# Altium PCB СхемаПолумостовая.PcbDoc
Units mm, origin at the board's own origin, x right, y up, seen from the top; angles counter-clockwise.
Board outline 169.54 x 72 mm, 2 copper layers (Top Layer, Bottom Layer); 84 components, 44 nets, 197 pads, 35 vias.
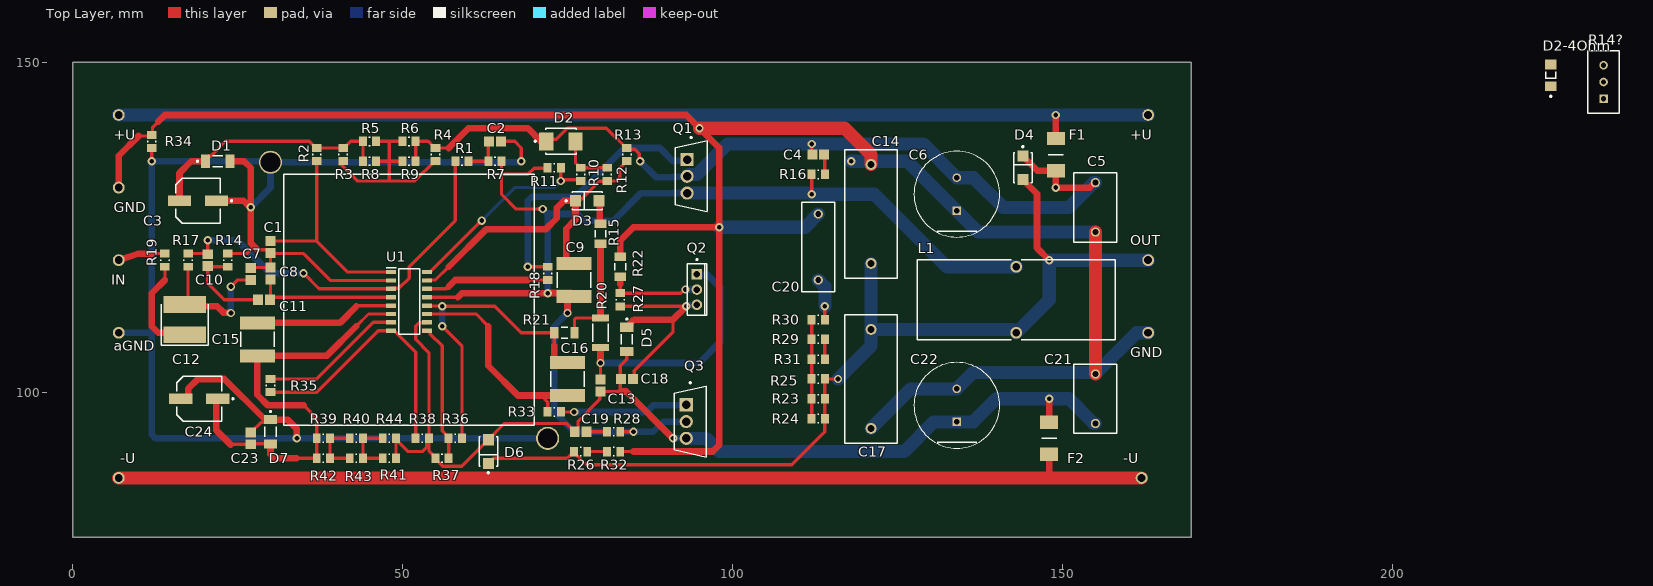
[diagram p0: Top Layer view]
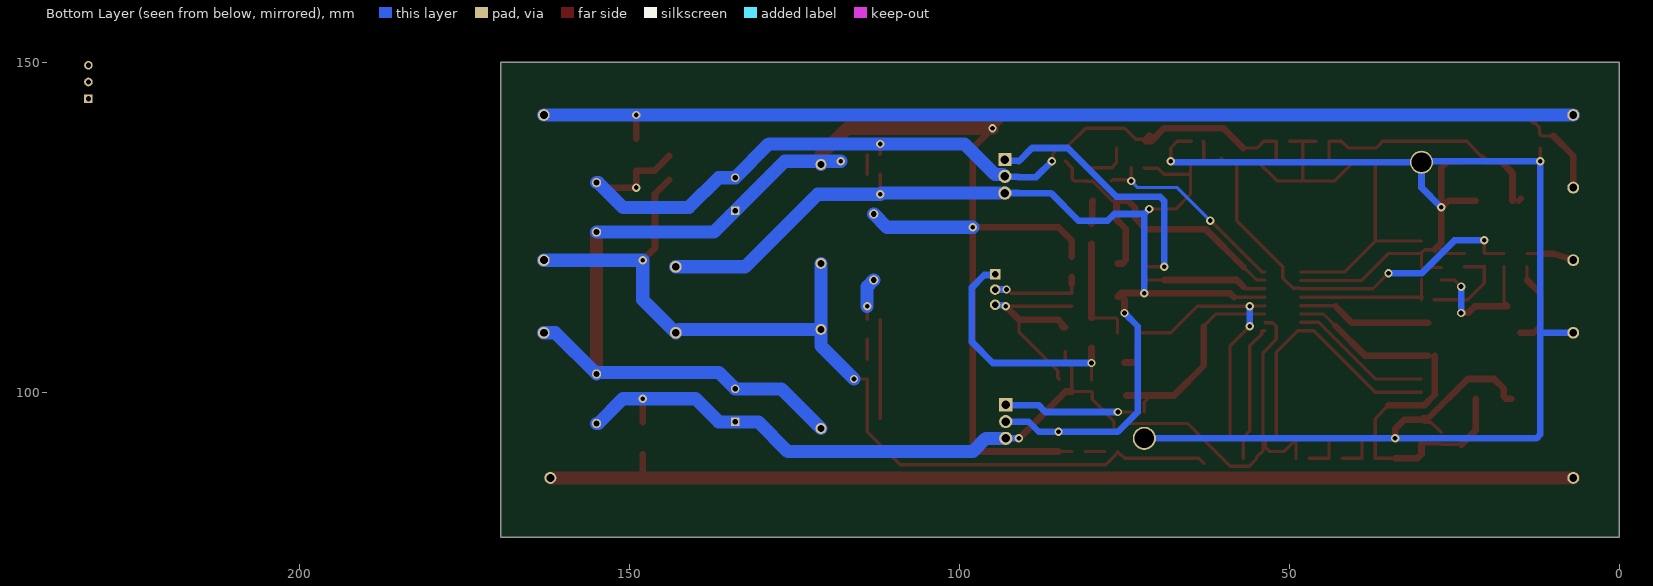
[diagram p1: Bottom Layer view, seen from below]
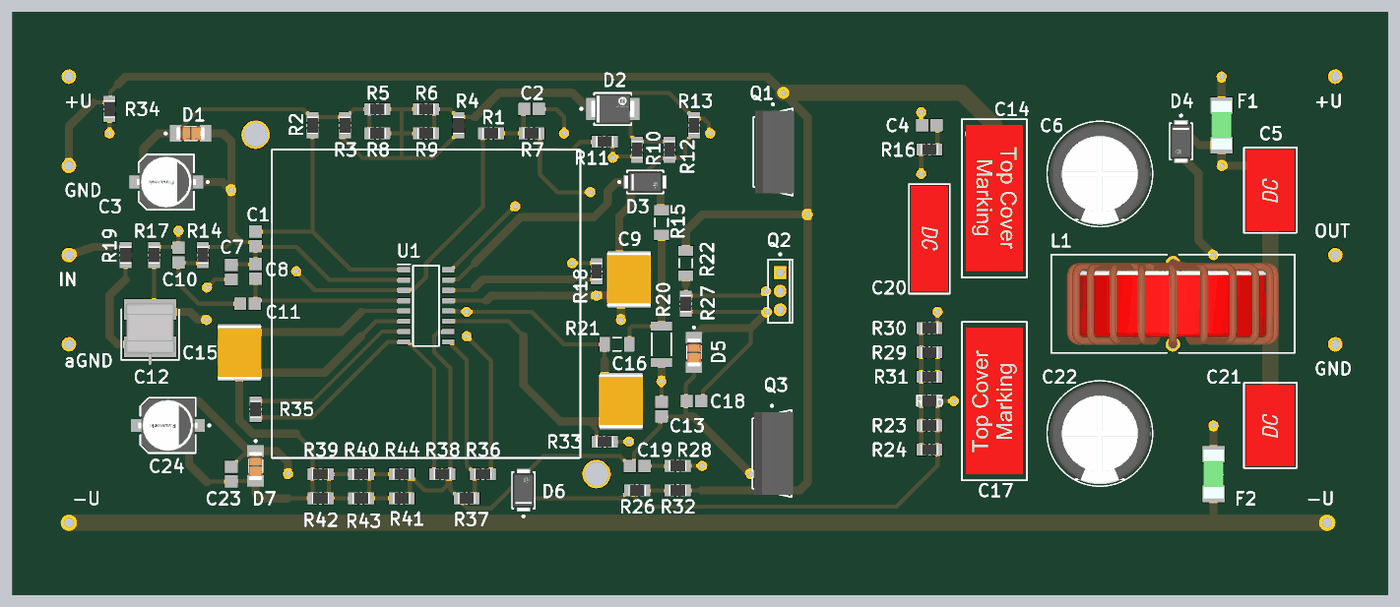
[diagram p2: 3D render of the assembled board from above, using the file's embedded part models]

## Layer stack, top to bottom
Top Solder: solder mask 0.0102, Solder Resist, Dk 3.5
Top Layer: signal copper 0.0356
Dielectric 1: dielectric 0.32, FR-4, Dk 4.8
Bottom Layer: signal copper 0.0356
Bottom Solder: solder mask 0.0102, Solder Resist, Dk 3.5

## Board outline
0,78 169.545,78 169.545,150 0,150

## Design rules (kind name [scope] priority, off if disabled: settings)
Clearance [All] p1: gap=0.254 ignorepadtopadclearanceinfootprint=FALSE
PolygonConnect [All] p1: connectstyle=Relief reliefconductorwidth=0.254 reliefentries=4 polygonreliefangle="90 Angle" airgapwidth=0.254
RoutingVias [All] p1: holewidth=0.711 width=1.27 viastyle="Through Hole" minholewidth=0.711 minwidth=1.27 maxholewidth=0.711 maxwidth=1.27
SolderMaskExpansion [All] p1: expansion=0.102 istentingtop=FALSE
SupplyNets "Schematic Supply Nets_1" [InNet('aGND')] p1: voltage=0.000
SupplyNets "Schematic Supply Nets" [InNet('GND')] p2: voltage=0.000
Width [All] p1: maxlimit=2 minlimit=0.5 preferedwidth=1 minimp=50.000000 maximp=50.000000 favimp=50.000000
30 further rules are at their usual default settings.

## Components (designator, comment, footprint, x,y, rotation, side; value= is the part's Value field where it differs from the comment)
C1 "2u2" CAPC2013X145X50ML20T25 30,122 r90 top
C2 "15p" CAPC2013X145X50ML20T25 64,138 r180 top
C3 "220u 16V" FP-OS-CON-SMT-C6-MFG 19,129 r180 top
C4 "220p" CAPC2013X145X50ML20T25 113,136 r180 top
C5 "0.068Uf" WCAP-FTX2_L10W6H12_CS 155,128 r90 top
C6 "470uF 63V" FP-RAD-TH-D_12_5_0_5-L_20-MFG 134,130 r90 top
C7 "2n2" CAPC2013X145X50ML20T25 27,117.9 r90 top
C8 "2n2" CAPC2013X145X50ML20T25 30,118 r90 top
C9 "22uF" CAPC5950X255X70LL75T35 76,117 r90 top
C10 "2n2" CAPC2013X145X50ML20T25 20.5,120 r90 top
C11 "2n2" CAPC2013X145X50ML20T25 29,114 r0 top
C12 "TAN 47u" CAPPC5760X640N 17,111 r90 top
C13 "2u2" CAPC2013X145X50ML20T25 80,101 r90 top
C14 "1uf 100V" WCAP-FTBP_L18W7H13 121,127 r270 top
C15 "22uF" CAPC5950X255X70LL75T35 28,108 r90 top
C16 "22uF" CAPC5950X255X70LL75T35 75,102 r90 top
C17 "1uf 100V" WCAP-FTBP_L18W7H13 121,102 r90 top
C18 "2u2" CAPC2013X145X50ML20T25 84,102 r0 top
C19 "220p" CAPC2013X145X50ML20T25 77,94 r0 top
C20 "0.022Uf" WCAP-FTX2_L13W4.5H9.5 113,122 r270 top
C21 "680nF" WCAP-FTX2_L10W6H12_CS 155,99 r90 top
C22 "470uF 63V" FP-RAD-TH-D_12_5_0_5-L_20-MFG 134,98 r90 top
C23 "2u2" CAPC2013X145X50ML20T25 27,93 r270 top
C24 "220u 16V" FP-OS-CON-SMT-C6-MFG 19.2,99 r180 top
D1 "BZV55C5V6" FP-DO-213AA-MFG 22,135 r0 top
D2 "MURS120T3G" FP-403A-03-MFG 74,138 r0 top
D2-4Ohm "BAV102" FP-100AD-IPC_A 224,148 r90 top
D3 "ES1D-E3/61T" FP-95400-MFG 78,129 r0 top value="10 pF"
D4 "ES1D-E3/61T" FP-95400-MFG 144,134 r270 top value="10 pF"
D5 "BZV55C12" FP-DO-213AA-MFG 84,108 r270 top
D6 "ES1D-E3/61T" FP-95400-MFG 63,91 r90 top value="10 pF"
D7 "BZV55C5V6" FP-DO-213AA-MFG 30,94 r270 top
F1 "10A" FUSC6025X270N 149,136 r90 top
F2 "10A" FUSC6025X270N 148,93 r270 top
L1 "10mH 30A" 744151 143,114 r0 top
Q1 "IRFB5615PBF" FP-PG-TO220-3-MFG 93.738,132.702 r0 top
Q2 "BD139" ONSC-TO-225-3-77-09 94.615,115.548 r0 top
Q3 "IRFB5615PBF" FP-PG-TO220-3-MFG 93.61,95.54 r0 top
R1 "68K" RESC2013X60X35ML10T20 59,135 r0 top
R2 "0R" RESC2013X60X35ML10T20 37,136 r90 top
R3 "2K2" RESC2013X60X35ML10T20 41,136 r270 top
R4 "2K2" RESC2013X60X35ML10T20 55,136 r90 top
R5 "2K2" RESC2013X60X35ML10T20 45,138 r0 top
R6 "2K2" RESC2013X60X35ML10T20 51,138 r0 top
R7 "0K5" RESC2013X60X35ML10T20 64,135 r180 top
R8 "2K2" RESC2013X60X35ML10T20 45,135 r0 top
R9 "2K2" RESC2013X60X35ML10T20 51,135 r0 top
R10 "1K8" RESC2013X60X35ML10T20 77,133 r90 top
R11 "8K2" RESC2013X60X35ML10T20 73,134 r0 top
R12 "8K2" RESC2013X60X35ML10T20 81,133 r90 top
R13 "18K" RESC2013X60X35ML10T20 84,136 r90 top
R14 "220R" RESC2013X60X35ML10T20 23.5,120 r90 top
R14? "3296W-220R" BOUR-3296W-1-3 232,147 r90 top
R15 "2R2" RESC3116X65X40ML10T20 80,124 r90 top
R16 "4R7" RESC2013X60X35ML10T20 113,133 r0 top
R17 "1K5" RESC2013X60X35ML10T20 17.5,120 r90 top
R18 "4R7" RESC2013X60X35ML10T20 72,118 r90 top
R19 "0K5" RESC2013X60X35ML10T20 14,120 r270 top
R20 "0R" RESC2010(5025)_L 80,109 r90 top value="1500.00 Ohm"
R21 "2R2" RESC3116X65X40ML10T20 74.525,109 r0 top
R22 "2R2" RESC3116X65X40ML10T20 83,119 r90 top
R23 "10R" RESC2013X60X35ML10T20 113,99 r0 top
R24 "10R" RESC2013X60X35ML10T20 113,96 r0 top
R25 "10R" RESC2013X60X35ML10T20 113,102 r0 top
R26 "0K5" RESC2013X60X35ML10T20 77,91 r180 top
R27 "8K2" RESC2013X60X35ML10T20 83,114 r90 top
R28 "4R7" RESC2013X60X35ML10T20 82,94 r0 top
R29 "10R" RESC2013X60X35ML10T20 113,108 r180 top
R30 "10R" RESC2013X60X35ML10T20 113,111 r180 top
R31 "10R" RESC2013X60X35ML10T20 113,105 r180 top
R32 "0K5" RESC2013X60X35ML10T20 82,91 r180 top
R33 "4R7" RESC2013X60X35ML10T20 73,97 r0 top
R34 "10R" RESC2013X60X35ML10T20 12,138 r90 top
R35 "7K5" RESC2013X60X35ML10T20 30,101 r90 top
R36 "7K5" RESC2013X60X35ML10T20 58,93 r0 top
R37 "2K7" RESC2013X60X35ML10T20 56,90 r180 top
R38 "2K4" RESC2013X60X35ML10T20 53,93 r0 top
R39 "1K" RESC2013X60X35ML10T20 38,93 r0 top
R40 "1K" RESC2013X60X35ML10T20 43,93 r0 top
R41 "1K" RESC2013X60X35ML10T20 48,90 r0 top
R42 "1K" RESC2013X60X35ML10T20 38,90 r0 top
R43 "1K" RESC2013X60X35ML10T20 43,90 r0 top
R44 "1K" RESC2013X60X35ML10T20 48,93 r0 top
U1 "IRS2092STRPBF" SOIC127P600X175-16N 51,113.75 r0 top

## Footprints (in the part's own frame and the unit in brackets; to place one, negate y for a bottom-side part, rotate by r counter-clockwise, add the part's x,y. Pads: shape width x height; smd on the part's side, far side on the other; paste and mask are expansions set on the pad)
744151 [mm] "THT Leaded Toroidal Storage Choke, body 30x12.1mm"
  round 1.8 hole 1.2: 1(0,5) 2(0,-5)
  silkscreen extent -15,-6.05 15,6.05, body extent -13.06,-5.5 13.06,5.5, height 25.56
BOUR-3296W-1-3 [mm] "THD, 3-Leads, Body 9.53x4.83mm, Pitch 2.54mm"
  rect 1.3x1.3 hole 0.8: 1(-2.54,0)
  round 1.3 hole 0.8: 2(0,0) 3(2.54,0)
  silkscreen extent -4.76,-2.41 4.76,2.42, body extent -4.76,-2.41 4.76,2.42, height 11.55
CAPC2013X145X50ML20T25 [mm] "Chip Capacitor, 2-Leads, Body 2.00x1.25mm, IPC Low Density"
  rect 1.5x1.55 smd: 1(-0.9,0) 2(0.9,0)
  body extent -1.1,-0.72 1.1,0.72, height 1.45
CAPC5950X255X70LL75T35 [mm] "Chip Capacitor, 2-Leads, Body 6.65x5.40mm, IPC High Density"
  rect 1.95x5.3 smd: 1(-2.5,0) 2(2.5,0)
  silkscreen extent -1.15,-2.55 1.15,2.55, body extent -3.32,-2.7 3.32,2.7, height 2.55
CAPPC5760X640N [mm]
  rect 2.55x6.4 smd: 1(-2.3,0) 2(2.3,0)
  silkscreen extent -3.93,-3.55 2.3,3.55, body extent -4.54,-3.02 3.05,3.02, height 6
FP-100AD-IPC_A [mm]
  rect 1.5x1.75 smd paste+0 mask+0: 1(-1.65,0) 2(1.65,0)
  silkscreen extent -3.3,-0.75 0.53,0.75, body extent -2.9,-1.38 2.9,1.38, height 0.25
FP-403A-03-MFG [mm]
  rect 2.159x2.743 smd paste+0 mask+0: 1(-2.21,0) 2(2.21,0)
  silkscreen extent -4,-1.97 2.3,1.97, body extent -3.39,-2.07 3.39,2.07, height 0.25
FP-95400-MFG [mm]
  rect 1.7x1.68 smd paste+0 mask+0: 1(-1.79,0) 2(1.79,0)
  silkscreen extent -3.32,-1.4 2.25,1.4, body extent -2.74,-1.5 2.74,1.5, height 0.25
FP-DO-213AA-MFG [mm]
  rect 1.4x2.03 smd paste+0 mask+0: 1(-1.84,0) 2(1.84,0)
  silkscreen extent -3.2,-0.85 0.76,0.85, body extent -2.64,-1.11 2.64,1.11, height 0.25
FP-OS-CON-SMT-C6-MFG [mm]
  rect 3.5x1.6 smd paste+0 mask+0: 1(-2.8,0) 2(2.8,0)
  silkscreen extent -5.23,-3.4 3.4,3.4, body extent -4.8,-3.65 4.8,3.65, height 0.25
FP-PG-TO220-3-MFG [mm]
  rect 2x2 hole 1.3 paste-2539.97 mask+0: 1(-0.61,2.54)
  round 2 hole 1.3 paste-2539.97 mask+0: 2(-0.61,0) 3(-0.61,-2.54)
  silkscreen extent -2.41,-5.38 2.41,6, body extent -2.51,-5.6 2.51,5.6, height 0.25
FP-RAD-TH-D_12_5_0_5-L_20-MFG [mm]
  rect 1.3x1.3 hole 0.8 paste-2539.97 mask+0: 1(-2.5,0)
  round 1.3 hole 0.8 paste-2539.97 mask+0: 2(2.5,0)
  silkscreen extent -6.5,-6.5 6.5,6.5, body extent -6.6,-6.6 6.6,6.6, height 0.25
FUSC6025X270N [mm]
  rect 2.04x2.72 smd: 1(-2.44,0) 2(2.44,0)
  silkscreen extent 0,-1.15 0,1.15, body extent -3,-1.25 3,1.25, height 2.7
ONSC-TO-225-3-77-09 [mm] "FM, 3-Leads, Body 7.8x3mm, Pitch 2.29mm"
  rect 1.6x1.6 hole 1: 1(0,2.29)
  round 1.6 hole 1: 2(0,0) 3(0,-2.29)
  silkscreen extent -1.49,-3.9 1.51,4.67, body extent -1.49,-3.9 1.51,3.9, height 13.64
RESC2010(5025)_L [mm] "Chip Resistor, Body 5.0x2.5mm, IPC High Density"
  rect 1.05x2.6 smd: 1(-2.25,0) 2(2.25,0)
  silkscreen extent -1.35,-1.2 1.35,1.2, body extent -2.6,-1.35 2.6,1.35, height 0.71
RESC2013X60X35ML10T20 [mm] "Chip Resistor, 2-Leads, Body 2.1x1.35mm, IPC Low Density"
  rect 1.2x1.45 smd: 1(-1,0) 2(1,0)
  silkscreen extent -0.1,-0.63 0.1,0.63, body extent -1.05,-0.68 1.05,0.67, height 0.6
RESC3116X65X40ML10T20 [mm] "Chip Resistor, 2-Leads, Body 3.10x1.60mm, IPC Low Density"
  rect 1.25x1.8 smd: 1(-1.525,0) 2(1.525,0)
  silkscreen extent -0.5,-0.8 0.5,0.8, body extent -1.6,-0.85 1.6,0.85, height 0.65
SOIC127P600X175-16N [mm]
  rect 1.522x0.65 smd: 1(-2.714,4.445) 2(-2.714,3.175) 3(-2.714,1.905) 4(-2.714,0.635) 5(-2.714,-0.635) 6(-2.714,-1.905) 7(-2.714,-3.175) 8(-2.714,-4.445) 9(2.714,-4.445) 10(2.714,-3.175) 11(2.714,-1.905) 12(2.714,-0.635) 13(2.714,0.635) 14(2.714,1.905) 15(2.714,3.175) 16(2.714,4.445)
  silkscreen extent -3.47,-4.94 1.6,5.12, body extent 0,0 0,0
WCAP-FTBP_L18W7H13 [mm] "Film Capacitors, 18x7x13mm"
  round 1.65 hole 1.1: 1(-7.5,0) 2(7.5,0)
  silkscreen extent -9.75,-4 9.75,4, body extent -9,-3.5 9,3.5, height 13.05
WCAP-FTX2_L10W6H12_CS [mm] "Film Capacitors, 10x6x12mm"
  round 1.4 hole 0.9: 1(-3.75,0) 2(3.75,0)
  silkscreen extent -5.25,-3.25 5.25,3.25, body extent -5,-3 5,3, height 12.05
WCAP-FTX2_L13W4.5H9.5 [mm] "Film Capacitors, 13x4.5x9.5mm"
  round 1.4 hole 0.9: 1(-5,0) 2(5,0)
  silkscreen extent -6.75,-2.5 6.75,2.5, body extent -6.5,-2.25 6.5,2.25, height 9.55

## Part data
C1 C2 C4 C7 C8 C10 C11 C13 C18 C19 C23: library part CMP-1036-04819-2, Manufacturer=Kemet, Part Number=C0805C225K9PACTU
C3 C24: library part CMP-05428-001013-1, "Conductive Polymer Aluminum Solid Capacitors (OS-CON) 220uF ±20% 16V", Capacitance=220uF, Case/Package=Radial, ESR (Equivalent Series Resistance)=22mR, Max Operating Temperature=125°C, Min Operating Temperature=-55°C, Tolerance=20%, Voltage Rating=16V, Life (Hours)=1000Hour, Mount="Surface Mount", Packaging="Tape and Reel"
C5 C21: library part CMP-03913-51400083-2, "890324022017CS Capacitor, Film, Polypropylene, 0.068Uf, 275Vac, Radial", Capacitance=68nF, Case/Package=Radial, Dielectric=PP, Insulation Resistance=30GΩ, Max Operating Temperature=105°C, Min Operating Temperature=-40°C, Tolerance=10%, Voltage Rating=275V, Dielectric Material=PP, Height=12mm, Height - Seated (Max)=12.4968mm, Hole Diameter=900µm, Lead Pitch=7.493mm, Length=10mm, Mount="Through Hole", NexarPartId=51400083, Packaging=Carton, Pin Length=4mm, Pitch=7.5mm, REACH SVHC=Unknown, RoHS=Compliant, Termination="PC Pins", Voltage Rating (AC)=275V, Voltage Rating (DC)=275V, Width=6mm
C6 C22: library part CMP-05427-001729-1, "Aluminum Electrolytic Capacitors (Radial Lead Type) AEC-Q200 Qualified 470uF ±20% 63V", Capacitance=470uF, Case/Package=Radial, Max Operating Temperature=105°C, Min Operating Temperature=-55°C, Package Quantity=500, Ripple Current=640mA, Tolerance=20%, Voltage Rating (DC)=63V, Construction=RADIAL, Contact Plating=Tin, Diameter=12.5mm, Height=20mm, Lead Diameter=0.6mm, Lead Pitch=5mm, Lead/Base Style=Straight, Length=20mm, Life (Hours)=2000Hour, Mount="Through Hole", Packaging="Ammo Pack", Radiation Hardening=No, RoHS Compliant=Yes, Series=NHG, Termination=Radial
C9 C15 C16: library part CMP-1664-00005-1, "Chip Capacitor, 22 uF, +/- 10%, 25 V, -55 to 125 degC, 2220 (5650 Metric), RoHS, Tape and Reel", Case Code (Imperial)=1812, Case Code (Metric)=4532, Current Rating="20 A", Max Operating Temperature="85 degC", Min Operating Temperature="-40 degC", Nominal Supply Voltage="33 V", Package Quantity=1000, Resistance="200 mohm", Case\Package=1812, ComponentLink1Description="Manufacturer URL", ComponentLink1URL=http://www.kemet.com/, ComponentLink2Description=Datasheet, ComponentLink2URL=http://www.mouser.com/ds/2/212/KEM_C1013_X7R_FT-CAP_SMD-346914.pdf, DatasheetVersion=Feb-16, Height="2 mm", Length="4.73 mm", Mount="Surface Mount", PackageDescription="2-Pin Surface Mount Device, Body 5.9 x 5 mm", PackageReference=2220, Packaging="Tape and Reel", REACH SVHC="No SVHC", RoHSCompliant=true, Voltage Rating="33 V", Width="3.41 mm"
C12: library part 597D476X0050Z2T, "Capacitor Polarised", Manufacturer_Name=Vishay, Mouser Part Number=71-597D476X0050Z2T, Arrow Part Number=597D476X0050Z2T, Arrow Price/Stock=https://www.arrow.com/en/products/597d476x0050z2t/vishay?region=nac, Datasheet Link=http://www.vishay.com/doc?40047, Height=6.4mm, Manufacturer_Part_Number=597D476X0050Z2T, Mouser Price/Stock=https://www.mouser.co.uk/ProductDetail/Vishay-Sprague/597D476X0050Z2T?qs=cyBetVxIfqkOZXvQZwfF4Q%3D%3D
C14 C17: library part CMP-03913-89437293-1, "890273325009CS Cap, 1Uf, 250V, Film, Radial Rohs Compliant: Yes", Capacitance=1µF, ESR (Equivalent Series Resistance)=22.08mΩ, Voltage Rating=250V, Height=13mm, Length=18mm, NexarPartId=89437293, Packaging=Carton, Pin Length=4mm, Pitch=15mm, RoHS=Compliant, Width=7mm
C20: library part CMP-03913-52220317-2, "890324023011 Film Capacitor, Wcap-Ftx2 Series, 0.022 F, 10%, Pp (Polypropylene), 275 Vac Rohs Compliant: Yes", Capacitance=22nF, Case/Package=Radial, Dielectric=PP, Insulation Resistance=30GΩ, Max Operating Temperature=105°C, Min Operating Temperature=-40°C, Tolerance=10%, Voltage Rating=275V, Dielectric Material=PP, Height=9.5mm, Height - Seated (Max)=10.0076mm, Hole Diameter=900µm, Lead Pitch=10.0076mm, Length=13mm, Mount="Through Hole", NexarPartId=52220317, Packaging=Bulk, Pin Length=18mm, Pitch=10mm, REACH SVHC=Unknown, RoHS=Compliant, Termination="PC Pins", Voltage Rating (AC)=275V, Voltage Rating (DC)=275V, Width=4.5mm
D1 D7: library part CMP-00252-16640727-1, "BZV55C5V6 Diode Zener Single 5.6V 2% 3.33mW 2-Pin MELF DO-213AA Bag", Max Operating Temperature=175°C, Min Operating Temperature=-65°C, Test Current=5mA, Tolerance=7%, Zener Voltage=5.6V, Element Configuration=Single, Lifecycle Status=Production, Mount="Surface Mount", NexarPartId=16640727, Number of Pins=2, RoHS=Non-Compliant, Voltage Tolerance=7%
D2: library part CMP-0902-00001-3, "DIODE GEN PURP 200V 2A SMB", Average Rectified Current=2A, Case/Package=SMB, Current Rating=1A, Forward Voltage=875mV, Max Forward Surge Current (Ifsm)=40A, Max Operating Temperature=175°C, Max Repetitive Reverse Voltage (Vrrm)=200V, Min Operating Temperature=-65°C, Package Quantity=2500, Peak Reverse Current=2uA, Contact Plating=Tin, Element Configuration=Single, Forward Current=2A, Height=2.13mm, Lead Free="Lead Free", Length=4.32mm, Max Reverse Voltage (DC)=200V, Max Surge Current=40A, Number of Pins=2, Output Current=1A, Packaging="Tape and Reel", Peak Non-Repetitive Surge Current=40A, Polarity=Standard, Radiation Hardening=No, REACH SVHC="No SVHC", Recovery Time=35ns, Reverse Recovery Time=35ns, Reverse Voltage=200V, Voltage Rating (DC)=200V, Width=3.56mm
D2-4Ohm: library part CMP-00278-84324523-1, "BAV102 Diode Ultra Fast Recovery Rectifier 200V 0.2A 2-Pin LL-34 T/R", Average Rectified Current=200mA, Capacitance=5pF, Case/Package=MELF, Forward Voltage=1.25V, Manufacturer Lifecycle Status=ACTIVE, Max Forward Surge Current (Ifsm)=1A, Max Junction Temperature (Tj)=200°C, Max Repetitive Reverse Voltage (Vrrm)=200V, Max Reverse Voltage (DC)=150V, Max Surge Current=4A, Min Operating Temperature=-65°C, Peak Reverse Current=100nA, Power Dissipation=500mW, Current Rating=200mA, Element Configuration=Single, Forward Current=200mA, Height=1.5mm, Lead Free="Lead Free", Lifecycle Status=Production, Max Operating Temperature=200°C, Mount="Surface Mount", NexarPartId=84324523, Number of Pins=34, Output Current=200mA, Packaging="Cut Tape", Peak Non-Repetitive Surge Current=4A, Polarity=Standard, Radiation Hardening=No, Recovery Time=50ns, Reverse Recovery Time=50ns, Reverse Voltage=200V, RoHS=Compliant, Schedule B="8541100080, 8541100080", Voltage Rating (DC)=200V, Weight=51.84mg
D3 D4 D6: library part CMP-02540-000037-1, "DIODE GEN PURP 200V 1A DO214AC", Capacitance="10 pF", Forward Current=1A, Manufacturer=Vishay, Max Junction Temp=+150°C, Max Repetitive Reverse Voltage=200V, Max Surge Forward Current=30A, Package=95400, Peak Reverse Current=5uA, Temperature="-55°C to +150°C", Temperature Range Low=-55°C, Automotive=No, Category=Diode, ComponentLink2Description=Datasheet, ComponentLink2URL=http://www.vishay.com/docs/88586/es1.pdf, Device Class L1="Discrete Semiconductors", Device Class L2=Diodes, Device Class L3="Rectifier Diodes", Digikey Description="DIODE GEN PURP 200V 1A DO214AC", Footprint Url=http://www.vishay.com/docs/95400/sma.pdf, Height=2.29mm, Lead Free=Yes, Manufacturer Part Number=ES1D-E3/61T, Mouser Description="Ultrafast Rectifier, Plastic Surface Mount, 1 A, 200 VDC, DO0214AC (SMA), RoHS", Octopart=https://octopart.com/es1d-e3%2F61t-vishay-39550266, RoHS=TRUE, Standoff Height=0mm, Temperature Range High=+150°C
D5: library part CMP-00252-75067900-1, "BZV55C12 Zener Diode Single 12.05V 5% 25Ohm 500mW 2-Pin DO-213AA", Max Operating Temperature=175°C, Max Reverse Leakage Current=100nA, Min Operating Temperature=-65°C, Power Dissipation=3.33mW, Reverse Voltage=8V, Zener Voltage=12.05V, Height=1.7mm, NexarPartId=75067900
F1 F2: library part CCF1N10TTE, "Fuse", Manufacturer_Name="KOA Speer", Mouser Part Number=660-CCF1N10TTE, Arrow Part Number=CCF1N10TTE, Arrow Price/Stock=https://www.arrow.com/en/products/ccf1n10tte/koa-speer-electronics?region=nac, Datasheet Link=https://componentsearchengine.com/Datasheets/1/CCF1N10TTE.pdf, Height=2.7mm, Manufacturer_Part_Number=CCF1N10TTE, Mouser Price/Stock=https://www.mouser.co.uk/ProductDetail/KOA-Speer/CCF1N10TTE?qs=rZB7yXOqaotLjZpPUC%2Fp3g%3D%3D
L1: library part CMP-03913-22803296-1, "744151 48 µH ±20% Ferrite Toroidal Inductor, 8.1A Idc, 25mO Rdc WE-SI", Ambient Temperature Range High=65°C, Ambient Temperature Range Low=-40°C, Current Rating=8.1A, Inductance=48µH, Max DC Current=5A, Max Operating Temperature=105°C, Series Resistance=25mΩ, Tolerance=20%, Core Material=Ferrite, Depth=12mm, Diameter=30mm, Height=12mm, Lead Pitch=10mm, Length=30mm, Min Operating Temperature=-40°C, Mount=Wire, NexarPartId=22803296, Pin Length=12mm, Pitch=1mm, RoHS=Compliant, Width=12.1mm
Q1 Q3: library part CMP-32901-000279-1, "MOSFET N-CH 150V 35A TO-220AB", Case/Package=TO-220, Continuous Drain Current (ID)=35A, Drain to Source Resistance=39mR, Drain to Source Voltage (Vdss)=150V, Gate to Source Voltage (Vgs)=20V, Input Capacitance=1.75nF, Max Operating Temperature=175°C, Max Power Dissipation=144W, Min Operating Temperature=-55°C, Threshold Voltage=3V, Element Configuration=Single, Halogen Free="Not Halogen Free", Height=0.65inch, Lead Free="Contains Lead", Length=0.42inch, Max Dual Supply Voltage=150V, Mount="Through Hole", Number of Pins=3, Packaging=Rail/Tube, Power Dissipation=144W, Rds On Max=39mR, REACH SVHC="No SVHC", RoHS Compliant=Yes, Turn-Off Delay Time=17.1ns, Turn-On Delay Time=8.6ns, Width=0.19inch
Q2: library part CMP-1048-01271-1, "Plastic Medium-Power Silicon NPN Transistor, 3-Pin TO-225, Bulk Box", Manufacturer="On Semiconductor", ComponentLink1Description="Manufacturer URL", ComponentLink1URL=http://www.onsemi.com/, ComponentLink2Description=Datasheet, ComponentLink2URL=http://www.onsemi.com/pub_link/Collateral/BD135-D.PDF, ComponentLink3Description="Package Specification", ComponentLink3URL=http://www.onsemi.com/pub_link/Collateral/77-09.PDF, DatasheetVersion="Rev. 16", IC Continuous (A)=1.5, Mounting Technology="Through Hole", PackageDescription="3-Pin Flange Mount, Vertical Straight Lead, Body 7.6 x 2.7 mm, Pitch 2.29 mm", PackageReference=TO-225-3-77-09, PackageVersion="Rev. AC, 12/2013", Packing="Bulk Box", PartNumber=BD139, Polarity=NPN, RoHS=FALSE
R1 R3 R4 R5 R6 R8 R9 R11 R12 R13 R17 R27 R35 R36 R37: library part CMP-2100-03671-1, "Chip Resistor, 1 KOhm, +/- 1%, 125 mW, -55 to 155 degC, 0805 (2012 Metric), RoHS, Tape and Reel", Case Code (Imperial)=0805, Case Code (Metric)=2012, Manufacturer=Yageo, Max Operating Temperature=155degC, Max Power Dissipation=125mW, Min Operating Temperature=-55degC, Package Description="2-Pin Surface Mounted Device, Body 2 x 1.25 mm", Package Quantity=1, Resistance=1.5KOhm, Temperature Coefficient=100ppm/degreesC, Tolerance=1%, Voltage Rating=150V, Case/Package=0805, Composition=ThickFilm, Datasheet URL=http://www.yageo.com/NewPortal/yageodocoutput?fileName=/pdf/R-Chip/PYu-RC_Group_51_RoHS_L_5.pdf, Datasheet Version="Rev. 5, 10/2016", Depth=1.25mm, Height=0.024inch, Lead Free=LeadFree, Length=0.079inch, Manufacturer URL=http://www.yageo.com/, Military Standard=Not, Number of Pins=2, Number of Terminations=2, Package Reference=0805, Packaging=TapeandReel, Power Rating=125mW, REACH SVHC=Unknown, RoHSCompliant=true, Termination=SMD/SMT, Voltage Rating (DC)=150V, Width=0.049inch
R2 R7 R14 R16 R18 R19 R23 R24 R25 R26 R28 R29 R30 R31 R32 R33 R34 R38 R39 R40 R41 R42 R43 R44: library part CMP-2100-03671-1, "Chip Resistor, 1 KOhm, +/- 1%, 125 mW, -55 to 155 degC, 0805 (2012 Metric), RoHS, Tape and Reel", Case Code (Imperial)=0805, Case Code (Metric)=2012, Manufacturer=Yageo, Max Operating Temperature=155degC, Max Power Dissipation=125mW, Min Operating Temperature=-55degC, Package Description="2-Pin Surface Mounted Device, Body 2 x 1.25 mm", Package Quantity=1, Resistance=1KOhm, Temperature Coefficient=100ppm/degreesC, Tolerance=1%, Voltage Rating=150V, Case/Package=0805, Composition=ThickFilm, Datasheet URL=http://www.yageo.com/NewPortal/yageodocoutput?fileName=/pdf/R-Chip/PYu-RC_Group_51_RoHS_L_5.pdf, Datasheet Version="Rev. 5, 10/2016", Depth=1.25mm, Height=0.024inch, Lead Free=LeadFree, Length=0.079inch, Manufacturer URL=http://www.yageo.com/, Military Standard=Not, Number of Pins=2, Number of Terminations=2, Package Reference=0805, Packaging=TapeandReel, Power Rating=125mW, REACH SVHC=Unknown, RoHSCompliant=true, Termination=SMD/SMT, Voltage Rating (DC)=150V, Width=0.049inch
R10: library part CMP-2100-03671-1, "Chip Resistor, 1 KOhm, +/- 1%, 125 mW, -55 to 155 degC, 0805 (2012 Metric), RoHS, Tape and Reel", Case Code (Imperial)=0805, Case Code (Metric)=2012, Manufacturer=Yageo, Max Operating Temperature=155degC, Max Power Dissipation=125mW, Min Operating Temperature=-55degC, Package Description="2-Pin Surface Mounted Device, Body 2 x 1.25 mm", Package Quantity=1, Resistance=1.8KOhm, Temperature Coefficient=100ppm/degreesC, Tolerance=1%, Voltage Rating=150V, Case/Package=0805, Composition=ThickFilm, Datasheet URL=http://www.yageo.com/NewPortal/yageodocoutput?fileName=/pdf/R-Chip/PYu-RC_Group_51_RoHS_L_5.pdf, Datasheet Version="Rev. 5, 10/2016", Depth=1.25mm, Height=0.024inch, Lead Free=LeadFree, Length=0.079inch, Manufacturer URL=http://www.yageo.com/, Military Standard=Not, Number of Pins=2, Number of Terminations=2, Package Reference=0805, Packaging=TapeandReel, Power Rating=125mW, REACH SVHC=Unknown, RoHSCompliant=true, Termination=SMD/SMT, Voltage Rating (DC)=150V, Width=0.049inch
R14?: library part CMP-1747-00002-1, "Square Trimpot(R) Trimming Potentiometer, 1000 Ohm, -55 to 125 degC, 3-Pin THD, RoHS, Tube", Case Code (Imperial)=0603, Case Code (Metric)=1608, Max Operating Temperature="155 degC", Min Operating Temperature="-55 degC", Package Quantity=5000, Power Rating="100 mW", Resistance="4.7 kohm", Tolerance=1%, Voltage Rating="75 V", Case\Package=0603, ComponentLink1Description="Manufacturer URL", ComponentLink1URL=http://www.bourns.com/, ComponentLink2Description=Datasheet, ComponentLink2URL=http://www.bourns.com/docs/Product-Datasheets/3296.pdf, DatasheetVersion=May-16, Height="0.45 mm", Length="1.6 mm", Mount="Surface Mount", PackageDescription="3-Pin Through Hole Device, Body 9.53 x 4.83 mm, Pitch 2.54 mm", PackageReference=3296W-1-3, Packaging="Tape and Reel", Pins=2, Radiation Hardening=No, REACH SVHC=Yes, RoHSCompliant=true, Weight="7.1E-05 oz", Width="0.8 mm"
R15 R21 R22: library part CMP-2100-03678-1, "Chip Resistor, 1 KOhm, +/- 1%, 0.25 W, -55 to 155 degC, 1206 (3216 Metric), RoHS, Tape and Reel", Case Code (Imperial)=1206, Case Code (Metric)=3216, Manufacturer=Yageo, Max Operating Temperature=155degC, Min Operating Temperature=-55degC, Package Description="2-Pin Surface Mount Device, Body 3.1 x 1.6 mm", Package Reference=1206.0, Power Rating=250mW, Resistance=1KOhm, Temperature Coefficient=100ppm/degreesC, Tolerance=1%, Voltage Rating=200V, Case/Package=1206, Composition=ThickFilm, Datasheet URL=http://www.yageo.com/NewPortal/yageodocoutput?fileName=/pdf/R-Chip/PYu-RC_Group_51_RoHS_L_5.pdf, Datasheet Version="Rev. 5, 10/2016", Depth=1.6mm, Height=0.55mm, Lead Free=LeadFree, Length=3.1mm, Manufacturer URL=http://www.yageo.com/, Military Standard=Not, Packaging=TapeandReel, REACH SVHC=Unknown, RoHSCompliant=true, Termination=SMD/SMT
R20: library part CMP-1017-00078-1, "1K5 0.75W 5% 2010 (5025 Metric)  SMD", Case-EIA=2010, Case-Metric=5025, Power="0.75 W", Tolerance="5 %", Technology=SMT
U1: "Integrated Circuit", Manufacturer_Name=Infineon, Mouser Part Number=942-IRS2092STRPBF, Arrow Part Number=IRS2092STRPBF, Arrow Price/Stock=https://www.arrow.com/en/products/irs2092strpbf/infineon-technologies-ag?region=nac, Datasheet Link=https://www.infineon.com/dgdl/irs2092.pdf?fileId=5546d462533600a401535675f1be2790, Height=1.75mm, Manufacturer_Part_Number=IRS2092STRPBF, Mouser Price/Stock=https://www.mouser.co.uk/ProductDetail/Infineon-Technologies/IRS2092STRPBF?qs=9%252BKlkBgLFf05m7YE8gkORQ%3D%3D

## Free pads (board coordinates)
  round 1.8 hole 1.2: 1(7,109) 1(7,131) (163,109) (163,120) +U(7,142) +U(163,142) -U(7,87) -U(162,87) IN(7,120)
  round 3.5 hole 3: 2(30,134.84) 2(72,93)

## Via types
v1: diameter 1.27, hole 0.711, Top Layer to Bottom Layer, 35 vias

## Nets (pads, with @x,y where several pads share a name; then routed paths per layer and width w, separated by ;. In a path a pad name is that pad's centre, name@x,y a point inside that pad or via, vN(x,y) a via of type N, cw(c..) or ccw(c..) an arc to the next point about the centre after c; other vN are vias at no path point)
+U: F1.2 pad.+U | length 159.6
  Top Layer w1: F1.2 v1(149,142)
  Bottom Layer w2: pad.+U@7,142 v1(149,142) pad.+U@163,142
-U: F2.2 pad.-U | length 158.6
  Top Layer w1: 148,87 F2.2
  Top Layer w2: pad.-U@7,87 148,87 pad.-U@162,87
aGND: C1.1 C2.1 C3.1 C7.2 C8.2 C23.1 C24.2 D1.2 D7.1 pad.1@7,109 pad.2 R14.2 R34.1 U1.2 | length 261.1
  Top Layer w0.5: v1(12,135) R34.1 ; R14.2 26.4,121 27.5,122.1 ; C23.1 27.025,93.9 28.515,95.39 29.55,95.39 D7.1 ; C7.2@27,118.9 C8.2 C1.1 ; 27.725,121.6 28,121.6 29.5,121.6 C1.1 ; U1.2 39.075,116.925 35,121 30.1,121 C1.1 ; C2.1 67,138 68,137 v1(68,135)
  Top Layer w1: C24.2 17.236,99 17.536,99.3 17.536,100.536 19,102 23,102 28.96,96.04 29.8,96.04 D7.1 32.574,95.84 34,94.414 v1(34,93) ; C3.1 25.927,129 26.927,128 v1(27,128) ; D1.2 26,135 27,134 v1(27,128) ; 28,121.6 27.5,122.1 27,122.6 v1(27,128) ; pad.2@30,134.84 pad.2@30,135.516
  Bottom Layer w1: pad.1@7,109 12,109 ; v1(27,128) 30,131 pad.2@30,134.84 ; v1(68,135) 67.927,135 67.767,134.84 pad.2@30,134.84 ; pad.2@72,93 v1(34,93) 12.586,93 12,93.586 12,109 ; 12,109 v1(12,135) 29.84,135 pad.2@30,134.84
GND: C5.1 C6.1 C14.1 C17.1 C20.1 C21.2 C22.2 pad.1@7,131 pad.@163,109 R22.2 R32.1 R34.2 | length 336.4
  Top Layer w0.5: 10,138.818 11.818,138.818 R34.2 ; R34.2@11.95,139 12.1,139.15 12.1,140.1 13,141 ; R32.1 85,91
  Top Layer w1: pad.1@7,131 7,135.818 10,138.818 ; 13,141 14,142 93,142 v1(95,140) 98,137 v1(98,125) ; R22.2 83,123 85,125 v1(98,125) ; 85,91 97,91 98,92 v1(98,125)
  Top Layer w2: v1(95,140) 117,140 121,136 C14.1 ; C21.2 C5.1
  Bottom Layer w2: v1(98,125) 111,125 C20.1 ; v1(118,135) C14.1@121,135 ; C17.1 127,100.5 C22.2 136.5,103 154.75,103 C21.2 161.25,109 pad.@163,109 ; C14.1 C14.1@121,135 ; C5.1 137.25,124.25 C6.1 126.5,135 C14.1@121,135
IN: pad.IN R19.1 | length 7.2
  Top Layer w0.5: 12,121 R19.1
  Top Layer w1: pad.IN 10,121 12,121
NetC1_2: C1.2 R2.1 U1.1 | length 32.3
  Top Layer w0.5: C1.2 37,122.9 ; R2.1 37,122.9 ; U1.1 41.705,118.195 37,122.9
NetC2_2: C2.2 R1.2 R7.2 | length 6.7
  Top Layer w0.5: R1.2@60.35,135.475 60,135.125 R1.2 R7.2 63,137.9 C2.2
NetC3_2: C3.2 D1.1 R2.2 R3.1 R5.1 R8.1 | length 38.4
  Top Layer w0.5: D1.1 20.16,135.315 20.61,135.765 20.925,135.765 23.16,138 35.875,138 36.875,137 R2.2 R3.1 41.125,137 42.125,138 R5.1 R8.1
  Top Layer w1: C3.2@14.95,129.3 C3.2@15.25,129 ; C3.2 16.2,133.2 18,135 D1.1
NetC4_1: C4.1 R16.2 | length 3
  Top Layer w0.5: R16.2 C4.1@114,136
NetC4_2: C4.2 C5.2 C6.2 D2.1 D4.1 F1.1 Q1.2 R4.2 R6.2 R9.2 R13.2 | length 138
  Top Layer w0.5: R9.2 R6.2 53.875,138 54.875,137 R4.2 57,137 ; D2.1 72.117,138.327 73.327,138.327 75,140 80.875,140 83.875,137 R13.2 84.182,136.818 85.182,136.818 85.853,136.147 85.853,135.147 v1(86,135) ; v1(112,137.611) 112,136.1 C4.2
  Top Layer w1: 57,137 60,140 69,140 71,138 D2.1@71.7,138 ; D2.1@71.211,138.872 71.79,138.292 D2.1 ; D4.1 144.34,135.44 146.22,133.56 F1.1 v1(149,131) 154.142,131 154.892,131.75 C5.2
  Bottom Layer w1: v1(86,135) 88.404,132.596 91.029,132.596 91.081,132.648 93.075,132.648 Q1.2
  Bottom Layer w2: Q1.2 93.414,132.988 94.648,132.988 99.271,137.611 v1(112,137.611) 128.889,137.611 C6.2 136.5,132.5 141,128 151,128 154.75,131.75 C5.2
NetC7_1: C7.1 C12.2 R17.1 | length 20.7
  Top Layer w0.5: C12.2 17.5,113.8 R17.1 ; v1(24,116) 25,117 C7.1
  Top Layer w1: C12.2@17,112.996 21.931,112.996 22.875,112.052 23.948,112.052 v1(24,112)
  Bottom Layer w1: v1(24,112) v1(24,116)
NetC8_1: C8.1 C11.2 U1.4 | length 21.5
  Top Layer w0.5: C11.2@29.9,114.385 C11.2@30,114.385 ; C11.2@30,114 C11.2@30,114.385 ; C8.1 C11.2@30,114.385 ; U1.4 C11.2@30,114.385
NetC9_1: C9.1 L1.1 Q1.3 Q3.2 R7.1 R11.1 R16.1 R28.2 U1.13 | length 178.4
  Top Layer w0.5: U1.13 58.385,114.385 ; R7.1 65,133 ; v1(71.248,127.752) 67.248,127.752 65,130 65,133 ; R11.1 71.943,133.943 69.943,133.943 69,133 65,133 ; R28.2 v1(85,94) ; v1(112,130) R16.1
  Top Layer w1: 58.385,114.385 59,115 v1(72,115) ; v1@72,115.025 C9.1@75.525,115.025 ; v1(75,112) 75,114.025 75.475,114.5 C9.1
  Bottom Layer w1: v1(71.248,127.752) 72,127 ; v1(72,115) 72,127 ; v1(75,112) 73,110 73,97 76,94 v1(85,94) 88,94 89.518,95.518 92.978,95.518 Q3.2 ; v1(93.128,130.162) 93.116,130.174 91.085,130.174 91.073,130.186 91.048,130.162 86.162,130.162 82,126 77.537,126 76.537,127 72,127
  Bottom Layer w2: v1(93.128,130.162) 111.838,130.162 v1(112,130) 121.5,130 132.5,119 L1.1
NetC9_2: C9.2 D3.1 R12.1 R13.1 U1.15 | length 50
  Top Layer w0.5: U1.15 53.789,117 55,117 57,119 ; D3.1@76.865,129 76.875,129 79.825,131.95 R12.1@81,131.95 ; R12.1 82.646,132 82.939,132.293 82.939,133.939 83.525,134.525 83.525,134.65 83.875,135 R13.1
  Top Layer w1: 57,119 62.663,124.663 71.663,124.663 73.365,126.365 73.365,127.905 74.446,128.986 75.86,128.986 75.874,129 D3.1 76.21,126.18 74.8,124.77 74.8,119.975 75.275,119.5 C9.2
NetC10_1: C10.1 C11.1 R14.1 | length 14.2
  Top Layer w0.5: C10.1 20.5,119.05 C10.1@20.5,119 ; R14.1 C10.1@20.5,119 ; C11.1 23,114 20.5,116.5 C10.1@20.5,119
NetC10_2: C10.2 R1.1 R17.2 U1.3 | length 59.8
  Top Layer w0.5: R17.2 20.4,121 20.5,121.1 v1(20.5,123) ; v1(35,118) 37.345,115.655 39,115.655 U1.3 48.361,115.73 49.437,115.73 51,117.293 51,119 58,126 R1.1
  Bottom Layer w1: v1(20.5,123) 25,123 30,118 v1(35,118)
NetC12_1: C12.1 R19.2 | length 13.2
  Top Layer w0.5: 14,117 R19.2
  Top Layer w1: 14,117 12,115 12,110 13,109 C12.1@15,109
NetC13_1: C13.1 C18.1 C19.1 C21.1 C22.1 D5.2 D6.2 F2.1 Q3.3 R37.2 R38.2 R41.2 R44.2 U1.10 | length 159.7
  Top Layer w0.5: R41.2 R44.2@49,92.875 ; R44.2 R44.2@49,92.875 ; U1.10 53.639,110.5 52.5,110.5 52,110 52,108 54,106 R38.2 ; D5.2 84,105 83,104 83,100.1 C13.1 79.868,99.968 79.868,98.893 76.6,95.625 76.6,94.5 C19.1 76.1,94.025 75.6,94.525 75.575,94.525 74.846,95.254 65.454,95.254 63,92.8 D6.2 63,92.78 58.991,88.771 56.104,88.771 55,89.875 R37.2 55,90.125 54,91.125 R38.2 ; R44.2@49,92.875 50.875,91 53,91 53.65,91.65 53.65,92.65 R38.2
  Top Layer w1: 83,100.1 83.9,100.1 v1(91,93) ; F2.1 v1(148,99)
  Bottom Layer w1: v1(91,93) Q3.3
  Bottom Layer w2: Q3.3 96,93 98,91 126,91 130.5,95.5 C22.1 136.5,95.5 140,99 v1(148,99) 151,99 154.75,95.25 C21.1
NetC13_2: C13.2 Q2.1 R20.1 | length 36.9
  Top Layer w0.5: v1(79.997,104.426) 79.997,101.903 C13.2
  Top Layer w1: v1(79.997,104.426) 79.999,104.427 79.999,106.749 R20.1
  Bottom Layer w1: v1(79.997,104.426) 94.96,104.426 98.12,107.586 98.12,115.88 96.249,117.751 94.702,117.751 Q2.1
NetC15_1: C15.1 C23.2 C24.1 D7.2 R39.1 R42.1 U1.6 | length 67.2
  Top Layer w0.5: C24.1 C24.1@22.007,99.007 ; 24,92 24.1,92.1 C23.2 27.06,92.16 29.696,92.16 29.848,92.312 D7.2 ; 34,90 R42.1 R39.1 37,96 35,98 ; 43,110 44.845,111.845 U1.6
  Top Layer w1: C24.1@21.8,99 21.8,94.2 24,92 ; C15.1 28,99.609 29.609,98 35,98 ; C15.1@29,105.5 38.5,105.5 43,110 ; D7.2 30,90.586 30.586,90 34,90
NetC15_2: C15.2 U1.5 | length 20.4
  Top Layer w0.5: 43,112.996 43.119,113.115 U1.5
  Top Layer w1: C15.2@29,110.5 40.504,110.5 43,112.996
NetC16_1: C16.1 R33.1 U1.11 | length 32.8
  Top Layer w0.5: U1.11 61.155,111.845 63,110 ; 71,99.5 72,98.5 R33.1 ; C16.1@72.5,99.5 C16.1@73.588,99.5 ; C16.1@74.725,99.5 C16.1
  Top Layer w1: 63,110 63,104 67.5,99.5 71,99.5 C16.1@72.5,99.5 ; C16.1@73.588,99.5 C16.1@74.725,99.5
NetC16_2: C16.2 R21.1 R36.2 U1.12 | length 48.5
  Top Layer w0.5: U1.12 53.771,113.058 55.942,113.058 v1(56,113) 64,113 68,109 R21.1 73,107 ; v1(56,110) 59,107 R36.2
  Top Layer w1: 73,107 73,104.975 73.475,104.5 C16.2
  Bottom Layer w1: v1(56,110) v1(56,113)
NetC18_2: C18.2 D5.1 Q2.3 R27.1 | length 33.8
  Top Layer w0.5: R27.1 v1(93,113) ; C18.2@84.9,101.975 85.107,102.182 85.107,103.232 91,109.125 91,111
  Top Layer w1: D5.1 84.315,109.84 84.515,110.04 84.515,110.414 85.101,111 91,111 v1(93,113)
  Bottom Layer w1: v1(93,113) 93.073,113 93.217,113.144 94.5,113.144 Q2.3
NetC19_2: C19.2 R28.1 | length 3.1
  Top Layer w0.5: C19.2 R28.1
NetC20_2: C20.2 R30.1 | length 6.4
  Top Layer w0.5: R30.1 v1(114,113)
  Bottom Layer w2: C20.2 114,116 v1(114,113)
NetD2_2: D2.2 R10.2 R12.2 | length 7.4
  Top Layer w0.5: D2.2@76.21,137 76.21,134.79 76.525,134.475 76.525,134.35 76.875,134 R12.2
NetD3_2: D3.2 R15.2 | length 3.6
  Top Layer w1: D3.2@79.8,129 D3.2 79.895,128.895 79.895,125.63 R15.2
NetQ1_1: Q1.1 R18.2 | length 41.4
  Top Layer w0.5: v1(69,119) R18.2
  Bottom Layer w1: v1(69,119) 69,129 69.611,129.611 76.222,129.611 83.611,137 89,137 91,135 91.052,135.052 92.938,135.052 Q1.1
NetQ2_2: Q2.2 R22.1 R27.2 | length 14.2
  Top Layer w0.5: 83,116.35 R27.2 92.197,115 92.746,115.548 v1(92.875,115.548)
  Top Layer w1: 83,116.35 R22.1
  Bottom Layer w1: v1@92.976,115.573 92.989,115.561 94.603,115.561 Q2.2
NetQ3_1: Q3.1 R33.2 | length 19.4
  Top Layer w0.5: R33.2 v1(76,97)
  Bottom Layer w1: v1(76,97) 87,97 88.04,98.04 92.96,98.04 Q3.1
NetR3_2: R3.2 R4.1 R5.2 R6.1 R8.2 R9.1 | length 30.8
  Top Layer w0.5: R3.2@40.5,134.5 40.625,134.5 43.125,132 48,132 ; R8.2 48,135 ; R5.2 48,138 ; R9.1 48,135 ; R6.1 48,138 ; R4.1 54.875,135 51.875,132 48,132 ; 48,132 48,135 ; 48,135 48,138
NetR10_1: R10.1 R11.2 U1.16 | length 32.9
  Top Layer w0.5: U1.16 54.15,118.195 61.955,126 v1(62,126) ; v1(74,132) R11.2 74,132.182 74.035,132.147 74.356,132.147 74.39,132.182 76.818,132.182 R10.1
  Bottom Layer w0.5: v1(62,126) 67,131 73,131 v1(74,132)
NetR15_1: R15.1 R20.2 R21.2 | length 17.2
  Top Layer w0.5: R21.2 76.05,110.95 76.35,111.25 R20.2
  Top Layer w1: R20.2 R15.1
NetR18_1: R18.1 U1.14 | length 18.8
  Top Layer w0.5: U1.14 56.655,115.655 57,116 ; 69,117 R18.1
  Top Layer w1: 57,116 58,117 69,117
NetR23_1: R23.1 R24.1 R25.1 R29.2 R30.2 R31.2 | length 15
  Top Layer w0.5: R24.1 R23.1 R25.1 R31.2 R29.2 R30.2
NetR26_1: R26.1 R32.2 | length 3
  Top Layer w0.5: R26.1 R32.2
NetR29_1: R29.1 R31.1 | length 3
  Top Layer w0.5: R31.1 R29.1
NetR35_1: R35.1 R38.1 U1.8 | length 40.2
  Top Layer w0.5: R35.1 37,100 46.305,109.305 U1.8 48.722,109.305 52,106.027 R38.1
NetR35_2: R35.2 U1.7 | length 21.8
  Top Layer w0.5: R35.2 37,102 45.575,110.575 U1.7
NetR36_1: R36.1 R37.1 U1.9 | length 20.9
  Top Layer w0.5: U1.9 54.15,109.305 54.225,109.23 54.225,108.794 56,107.019 56,94.125 57,93.125 R36.1 R37.1
NetR39_2: R39.2 R40.1 R42.2 R43.1 | length 9
  Top Layer w0.5: R43.1 R42.2 R39.2 R40.1
NetR40_2: R40.2 R41.1 R43.2 R44.1 | length 9
  Top Layer w0.5: R41.1 R43.2 R40.2 R44.1
OUT: C14.2 C17.2 D4.2 D6.1 L1.2 pad.@163,120 R23.2 R24.2 R25.2 R26.2 | length 148.5
  Top Layer w0.5: D6.1 63,89.22 63.78,90 75,90 75.525,90.525 75.65,90.525 76,90.875 R26.2 76.35,90.525 77.875,89 109,89 114,94 R24.2 R23.2 R25.2 v1(116,102)
  Top Layer w1: D4.2 144,132.2 146.144,130.056 146.144,121.856 v1(148,120)
  Bottom Layer w2: v1(116,102) 121,107 C17.2 ; C14.2 C17.2 ; pad.@163,120 162,120 v1(148,120) 148,114 L1.2 142.5,109.5 C17.2
pads on no net: D2-4Ohm.1 D2-4Ohm.2 R14?.1 R14?.2 R14?.3

## Polygon pours and split planes (outlines as drawn)
no net on Top Overlay (none): 32,133 70,133 70,95 32,95

## Silkscreen, mask and mechanical layers (free items; w line width, h text height)
Top Overlay:
  text "+U" at 6.254,138.254 h1.52
  text "+U" at 160.254,138.254 h1.52
  text "GND" at 6.254,127.254 h1.52
  text "OUT" at 160.254,122.254 h1.52
  text "IN" at 5.857,116.254 h1.52
  text "aGND" at 6.254,106.254 h1.52
  text "GND" at 160.254,105.254 h1.52
  text "-U" at 7.254,89.254 h1.52
  text "-U" at 159.254,89.254 h1.52